# Altium PCB PiezoControlBoard.PcbDoc (part 1 of 3)
Units mm, origin at the board's own origin, x right, y up, seen from the top; angles counter-clockwise.
Board outline 90 x 115 mm, 4 copper layers (SIGNAL TOP, GND, PWR, SIGNAL BOT), stack 1.59 mm thick; 145 components, 86 nets, 512 pads, 287 vias.
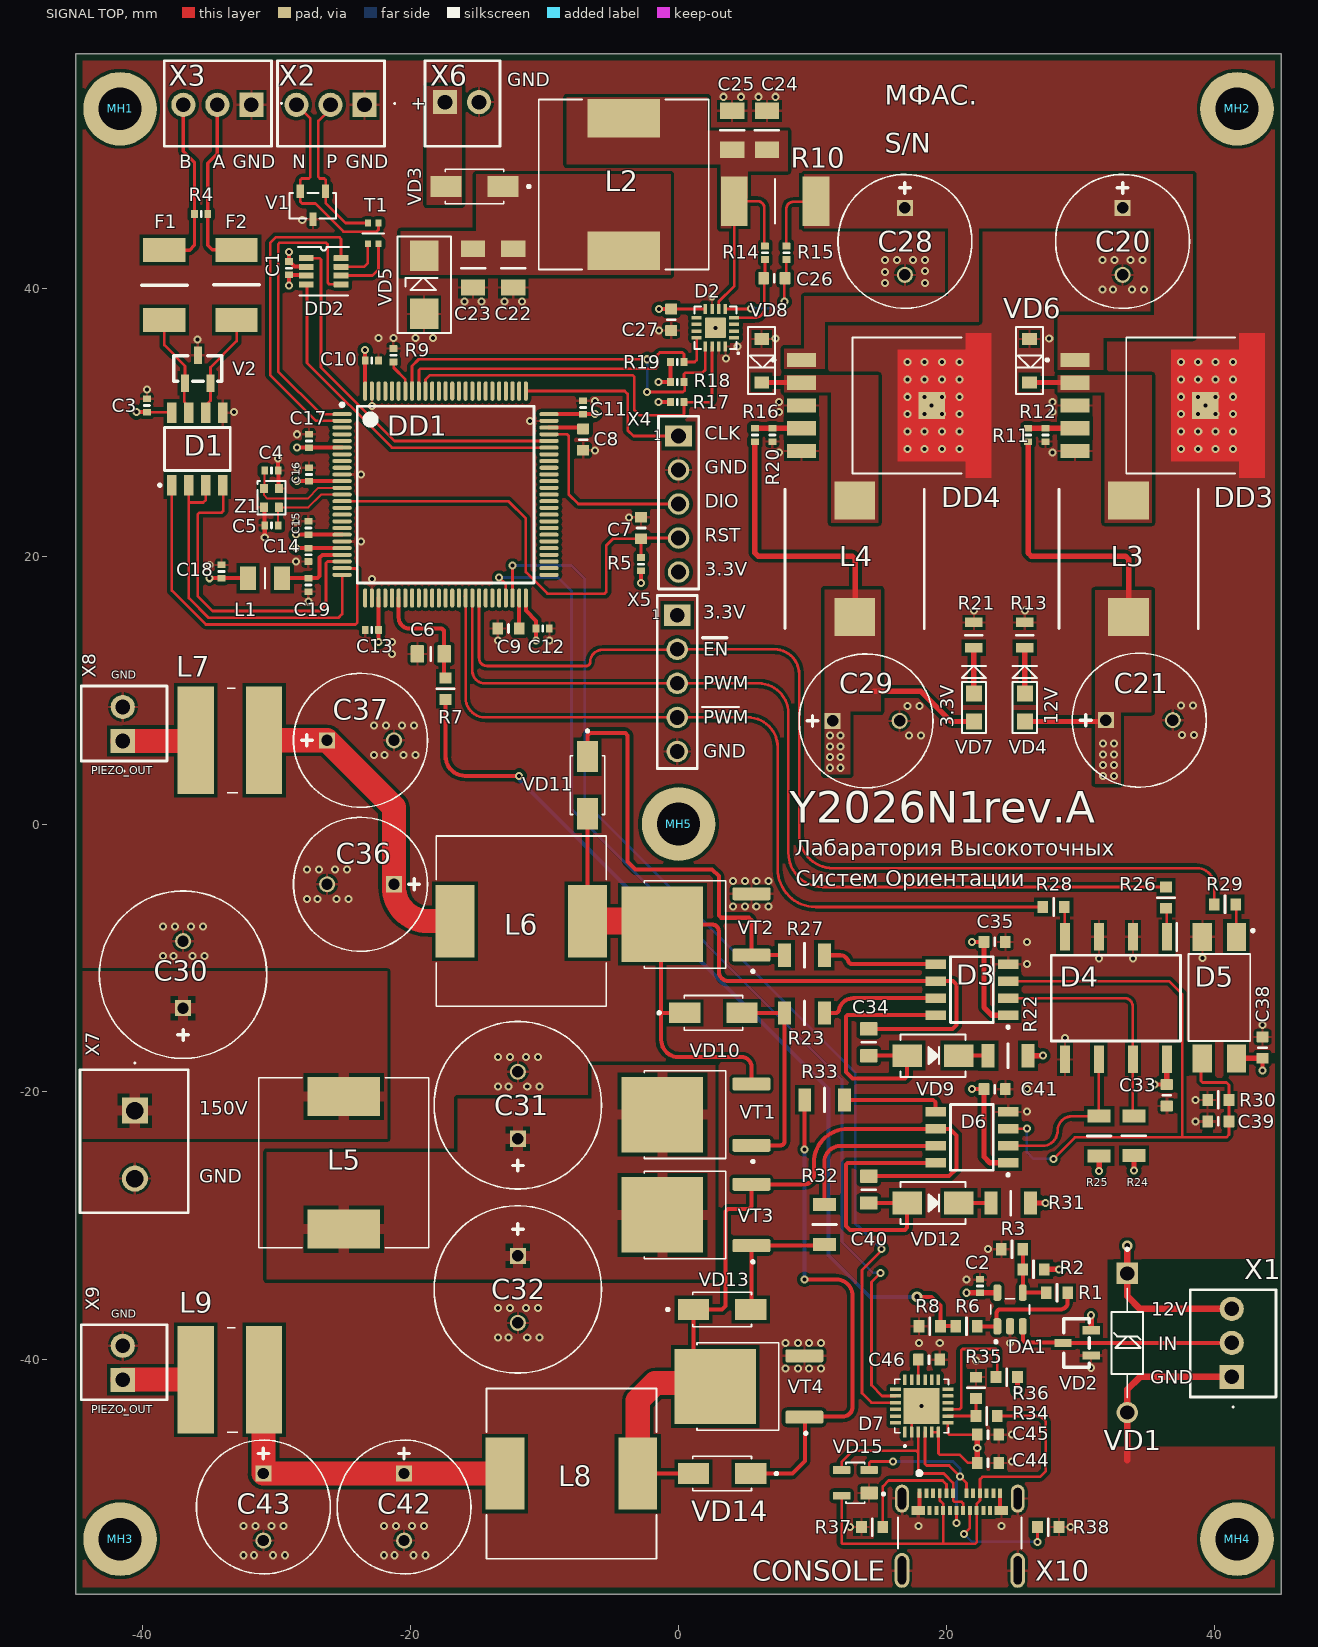
[diagram p0: SIGNAL TOP view]
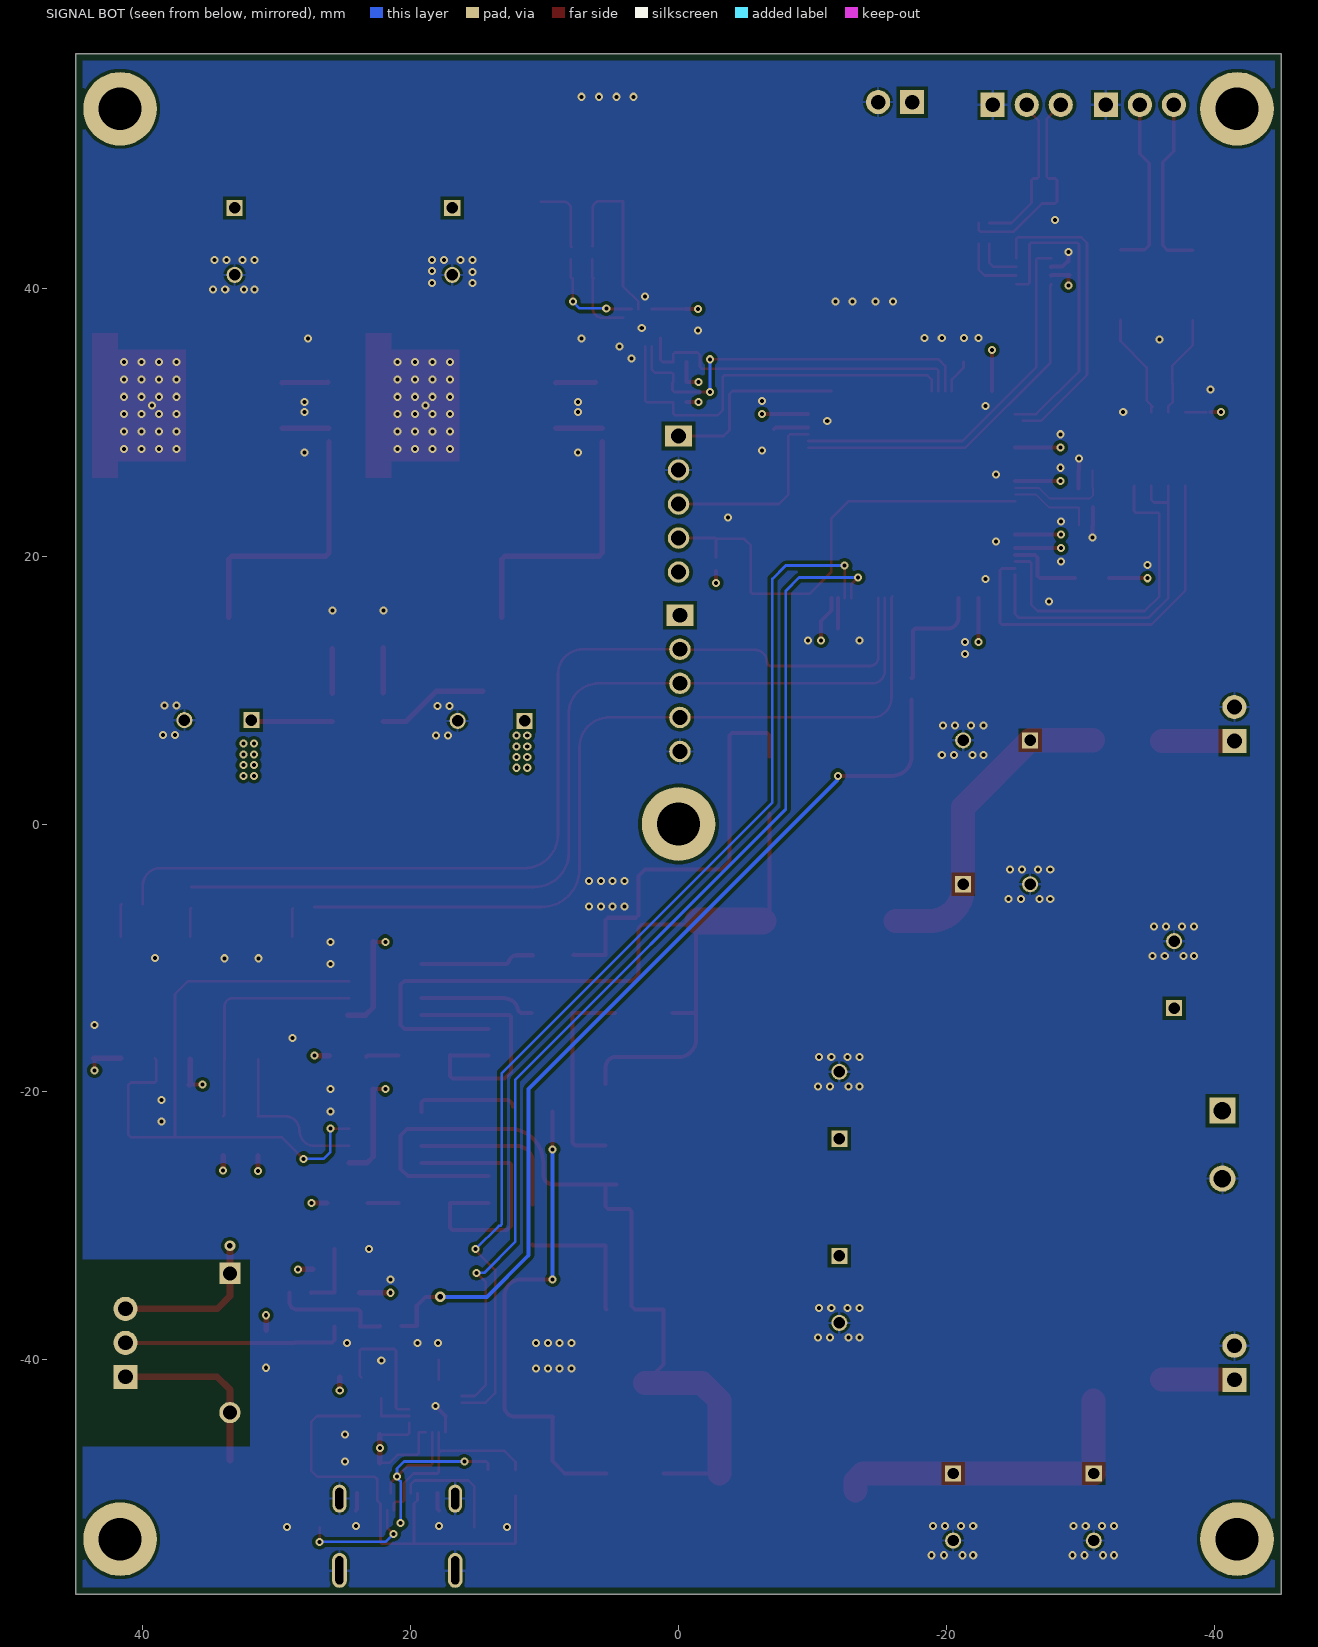
[diagram p1: SIGNAL BOT view, seen from below]
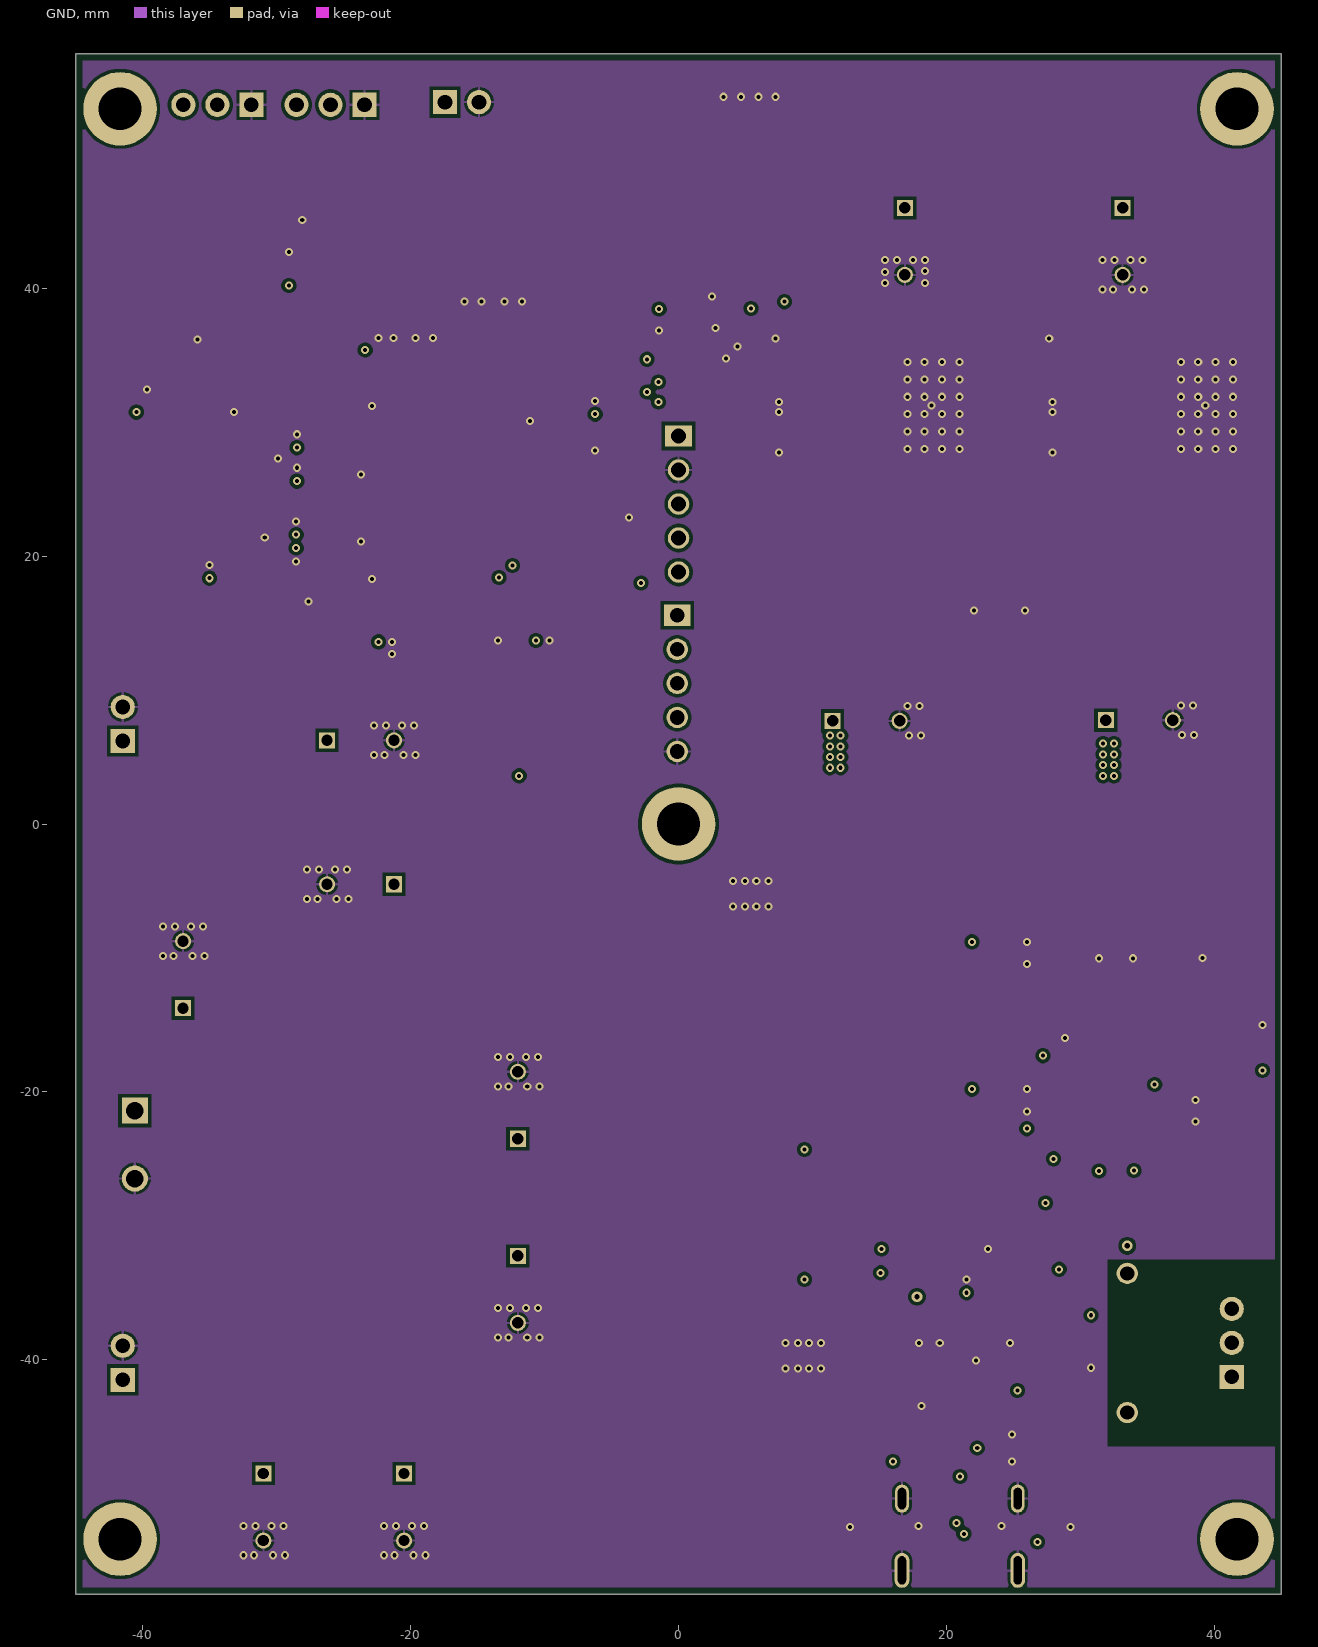
[diagram p2: GND]
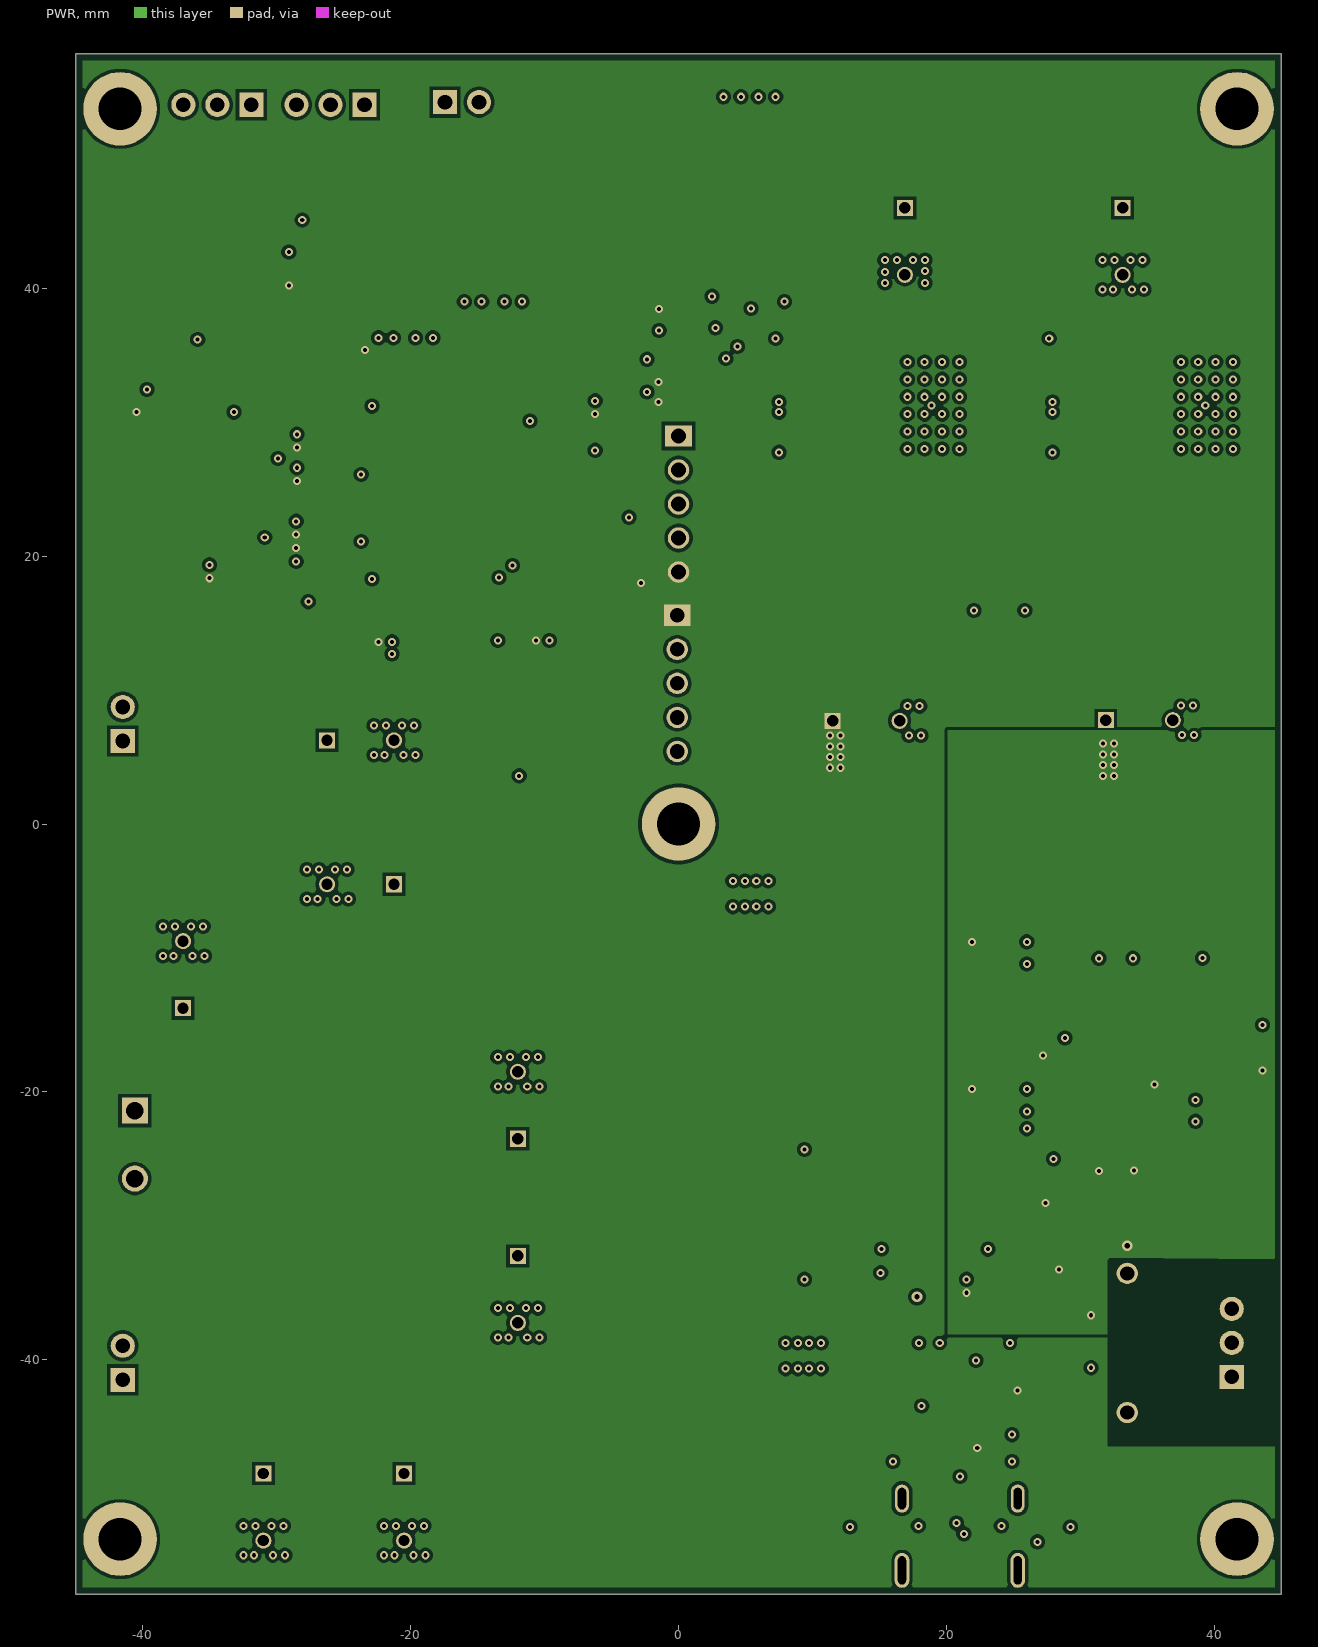
[diagram p3: PWR]
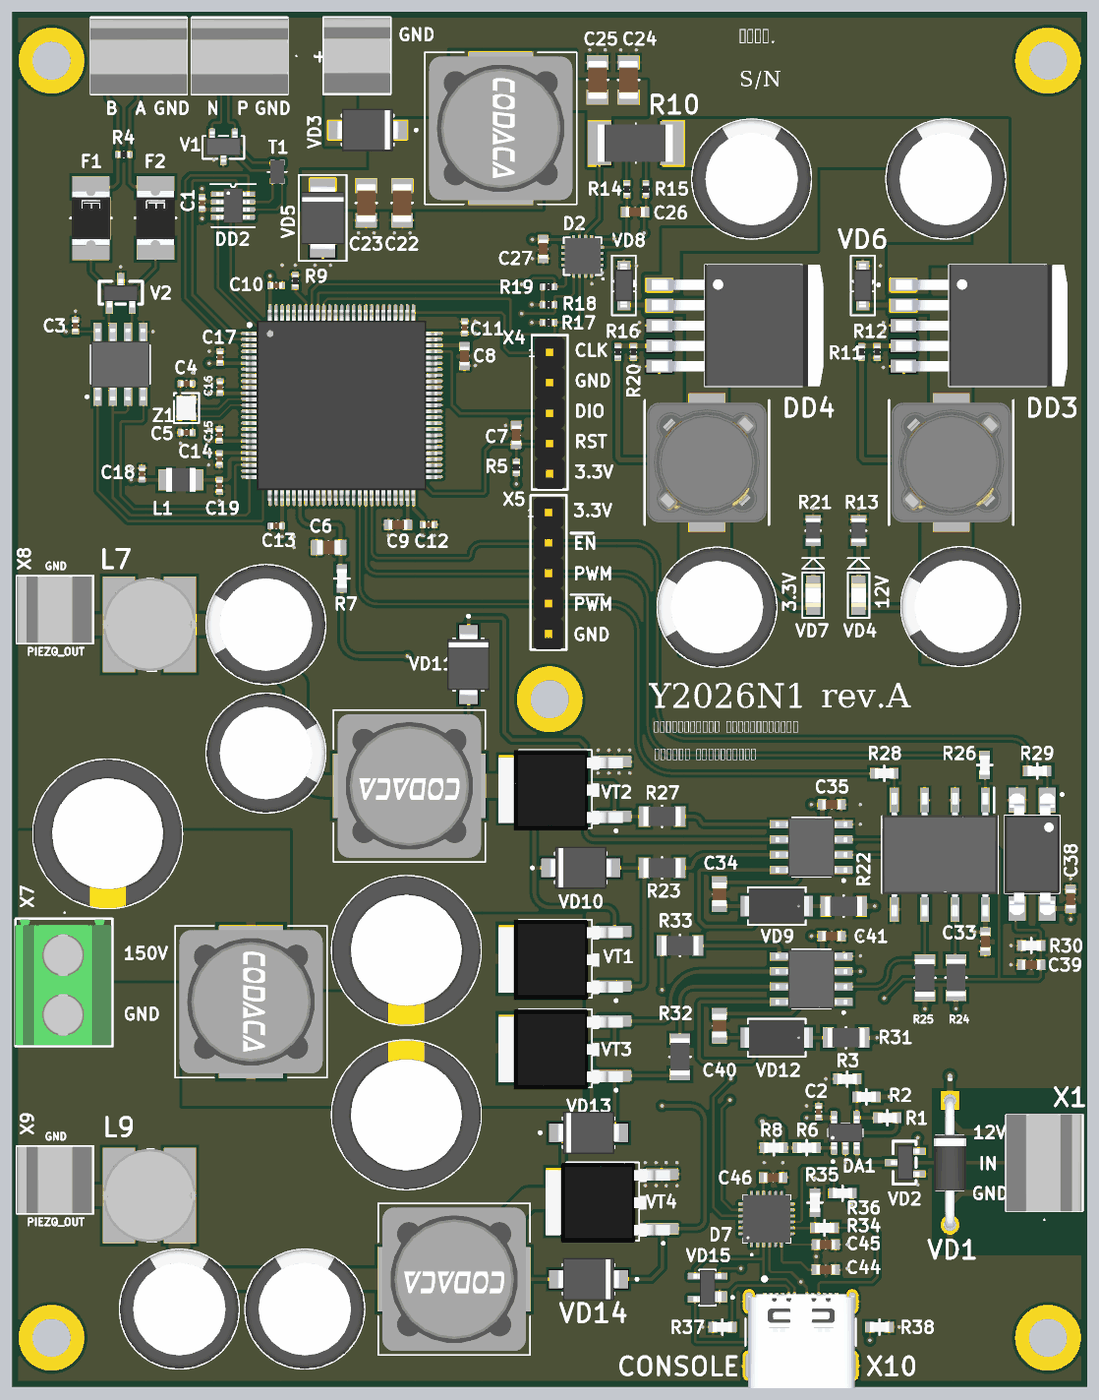
[diagram p5: 3D render of the assembled board from above, using the file's embedded part models]

## Layer stack, top to bottom
Top Solder: solder mask 0.01, Solder Resist, Dk 3.5
SIGNAL TOP: signal copper 0.035
Dielectric 2: prepreg 0.125, PP-006, Dk 4.1
GND: signal copper 0.035
Dielectric 1: dielectric 1.2, FR-4, Dk 4.8
PWR: signal copper 0.035
Dielectric 3: prepreg 0.125, PP-006, Dk 4.1
SIGNAL BOT: signal copper 0.035
Bot Solder: solder mask 0.01, Solder Resist, Dk 3.5

## Board outline
-45,-57.5 -45,57.5 45,57.5 45,-57.5

## Design rules (kind name [scope] priority, off if disabled: settings)
BoardOutlineClearance [All] p1: gap=0.2 ignorepadtopadclearanceinfootprint=FALSE
Clearance Clearance@Poly [All vs InPoly] p1: gap=0.25 ignorepadtopadclearanceinfootprint=FALSE
Clearance [All] p2: gap=0.2 ignorepadtopadclearanceinfootprint=FALSE
DiffPairsRouting [All] p1: maxlimit=0.4 minlimit=0.2 mostfreqgap=0.4 toplayer_mingap=0.4 toplayer_minwidth=0.2 toplayer_maxwidth=0.2 toplayer_prefwidth=0.2 bottomlayer_mingap=0.4 bottomlayer_minwidth=0.2 bottomlayer_maxwidth=0.2 bottomlayer_prefwidth=0.2 impedanceprofiledriven=TRUE impedanceprofileid={055DAC7E-D55A-460F-9663-2A1CB5194721} impedanceprofilevalue=100.000000 maxuncoupledlength=12.7
HoleSize [All] p1: absolutevalues=TRUE maxlimit=6 minlimit=0.2 maxpercent=80.000 minpercent=20.000
HoleToHoleClearance [All] p1: gap=0.2 allowstackedmicrovias=TRUE
MinimumSolderMaskSliver [All] p1: minsoldermaskwidth=0.1
PasteMaskExpansion [All] p1: expansion=-0.025
PlaneClearance [All] p1: clearance=0.25
PlaneConnect [All] p1: pad.planeconnectstyle=Relief pad.reliefexpansion=0.2 pad.reliefentries=4 pad.reliefconductorwidth=0.2 pad.reliefairgap=0.2 via.planeconnectstyle=Direct via.reliefexpansion=0.508 via.reliefentries=4 via.reliefconductorwidth=0.254 via.reliefairgap=0.254
PolygonConnect PolygonConnect@HV [InNetClass('HIGH_VOLTAGE')] p1: connectstyle=Relief reliefconductorwidth=0.8 reliefentries=4 polygonreliefangle="90 Angle" airgapwidth=0.3
PolygonConnect PWR_NET [InNetClass('POWER_NET')] p2: connectstyle=Direct reliefconductorwidth=0.254 reliefentries=4 polygonreliefangle="90 Angle" airgapwidth=0.254
PolygonConnect [All] p3: thpad.connectstyle=Relief thpad.reliefconductorwidth=0.2 thpad.reliefentries=4 thpad.polygonreliefangle="90 Angle" thpad.airgapwidth=0.2 smdpad.connectstyle=Relief smdpad.reliefconductorwidth=0.2 smdpad.reliefentries=4 smdpad.polygonreliefangle="90 Angle" smdpad.airgapwidth=0.2 via.connectstyle=Direct via.reliefconductorwidth=0.2 via.reliefentries=4 via.polygonreliefangle="90 Angle" via.airgapwidth=0.2
RoutingVias [All] p1: holewidth=0.3 width=0.6 viastyle="Through Hole" minholewidth=0.3 minwidth=0.6 maxholewidth=0.6 maxwidth=3
SilkToSilkClearance [All] p1: silktosilkclearance=0
SilkToSolderMaskClearance [IsPad] p1: minsilkscreentomaskgap=0.1 clearancetoexposedcopper=TRUE
SolderMaskExpansion Via [IsVia] p1: expansion=0.102 istentingtop=TRUE
SolderMaskExpansion [All] p2: expansion=0.025 istentingtop=FALSE
Width [All] p1: maxlimit=2 minlimit=0.125 preferedwidth=0.15
21 further rules are at their usual default settings.

## Classes and differential pairs
net class HIGH_VOLTAGE: +150V +150V_FILT
net class POWER_NET: +3.3V +12V NetC20_P NetC22_2 NetDD3_2 NetDD4_2 NetVD3_A PWR_IN pwr_in_filt
component class Power_Management: C20 C21 C22 C23 C24 C25 C26 C27 C28 C29 D2 DD3 DD4 L2 L3 L4 MH1 MH2 MH3 MH4 MH5 R10 R11 R12 R13 R14 R15 R16 R17 R18 R19 R20 R21 VD3 VD4 VD5 VD6 VD7 VD8 X6
component class MCU_Control: C1 C2 C3 C4 C5 C6 C7 C8 C9 C10 C11 C12 C13 C14 C15 C16 C17 C18 C19 D1 DA1 DD1 DD2 F1 F2 L1 R1 R2 R3 R4 R5 R6 R7 R8 R9 T1 V1 V2 VD1 VD2 X1 X2 X3 X4 X5 Z1
component class HV_Piezo_Driver: C30 C31 C32 C33 C34 C35 C36 C37 C38 C39 C40 C41 C42 C43 D3 D4 D5 D6 L5 L6 L7 L8 L9 R22 R23 R24 R25 R26 R27 R28 R29 R30 R31 R32 R33 VD9 VD10 VD11 VD12 VD13 VD14 VT1 VT2 VT3 VT4 X7 X8 X9
component class Console: C44 C45 C46 D7 R34 R35 R36 R37 R38 VD15 X10
differential pair CAN_1: +CAN_1_P -CAN_1_N
differential pair CAN_1F: +CAN_1F_P -CAN_1F_N

## Components (designator, comment, footprint, x,y, rotation, side; value= is the part's Value field where it differs from the comment)
C1 "CAP-0.1мкФ-10%-25В-X7R-0402" CAP-0402 -29.1,41.5 r90 top locked value=0.1мкФ
C2 "CAP-0.1мкФ-10%-25В-X7R-0402" CAP-0402 22.5,-34.5 r90 top locked value=0.1мкФ
C3 "CAP-0.1мкФ-10%-25В-X7R-0402" CAP-0402 -39.7,31.25 r90 top locked value=0.1мкФ
C4 "CAP-10 пФ-5%-50 В-NP0-0402" CAP-0402 -30.4,26.4 r180 top locked value="10 пФ"
C5 "CAP-10 пФ-5%-50 В-NP0-0402" CAP-0402 -30.4,22.3 r0 top locked value="10 пФ"
C6 "CAP-4.7нФ-5%-50В-C0G-0805" CAP-0805 -18.5,12.7 r0 top locked value=4.7нФ
C7 "CAP-2.2 мкФ-10%-25 В-X5R-0603" CAP-0603 -2.8,22.1 r270 top locked value="2.2 мкФ"
C8 "CAP-2.2 мкФ-10%-25 В-X5R-0603" CAP-0603 -7.125,28.7 r90 top locked value="2.2 мкФ"
C9 "CAP-2.2 мкФ-10%-25 В-X5R-0603" CAP-0603 -12.7,14.6 r0 top locked value="2.2 мкФ"
C10 "CAP-0.47 мкФ-10%-25 В-X5R-0402" CAP-0402 -22.9,34.6 r0 top locked value="0.47 мкФ"
C11 "CAP-0.47 мкФ-10%-25 В-X5R-0402" CAP-0402 -7.125,31.1 r90 top locked value="0.47 мкФ"
C12 "CAP-0.47 мкФ-10%-25 В-X5R-0402" CAP-0402 -10.15,14.6 r0 top locked value="0.47 мкФ"
C13 "CAP-0.47 мкФ-10%-25 В-X5R-0402" CAP-0402 -22.9,14.5 r180 top locked value="0.47 мкФ"
C14 "CAP-0.47 мкФ-10%-25 В-X5R-0402" CAP-0402 -27.65,20.1 r270 top locked value="0.47 мкФ"
C15 "CAP-0.47 мкФ-10%-25 В-X5R-0402" CAP-0402 -27.65,22.1 r90 top locked value="0.47 мкФ"
C16 "CAP-0.47 мкФ-10%-25 В-X5R-0402" CAP-0402 -27.6,26.1 r90 top locked value="0.47 мкФ"
C17 "CAP-0.47 мкФ-10%-25 В-X5R-0402" CAP-0402 -27.6,28.6 r90 top locked value="0.47 мкФ"
C18 "CAP-0.47 мкФ-10%-25 В-X5R-0402" CAP-0402 -34.125,18.85 r90 top locked value="0.47 мкФ"
C19 "CAP-0.1мкФ-10%-25В-X7R-0402" CAP-0402 -27.65,17.85 r90 top locked value=0.1мкФ
C20 "CAP-100мкФ-20%-100В-105°C-Radial" CAP_RADIAL_10X20_P5 33.15,43.5 r270 top locked value=100мкФ
C21 "CAP-1000мкФ-20%-25В-105°C-Radial" CAP_RADIAL_10X20_P5 34.4,7.75 r0 top locked value=1000мкФ
C22 "CAP-10 мкФ-10%-50 В-X5R-1206" CAP_1206 -12.35,41.5 r90 top locked value="10 мкФ"
C23 "CAP-10 мкФ-10%-50 В-X5R-1206" CAP_1206 -15.35,41.5 r90 top locked value="10 мкФ"
C24 "CAP-10 мкФ-10%-50 В-X5R-1206" CAP_1206 6.6,51.8 r270 top locked value="10 мкФ"
C25 "CAP-10 мкФ-10%-50 В-X5R-1206" CAP_1206 4,51.8 r270 top locked value="10 мкФ"
C26 "CAP-0.1мкФ-10%-50В-X7R-0603" CAP-0603 7.15,40.75 r0 top locked value=0.1мкФ
C27 "CAP-0.1мкФ-10%-50В-X7R-0603" CAP-0603 -0.55,37.65 r270 top locked value=0.1мкФ
C28 "CAP-100мкФ-20%-100В-105°C-Radial" CAP_RADIAL_10X20_P5 16.9,43.5 r270 top locked value=100мкФ
C29 "CAP-1000мкФ-20%-25В-105°C-Radial" CAP_RADIAL_10X20_P5 14,7.7 r0 top locked value=1000мкФ
C30 "CAP-100мкФ-20%-200В-105°C-Radial" CAP_RADIAL_13X17_P5 -37,-11.25 r90 top locked value=100мкФ
C31 "CAP-100мкФ-20%-200В-105°C-Radial" CAP_RADIAL_13X17_P5 -12,-21 r90 top locked value=100мкФ
C32 "CAP-100мкФ-20%-200В-105°C-Radial" CAP_RADIAL_13X17_P5 -12,-34.75 r270 top locked value=100мкФ
C33 "CAP-0.1мкФ-10%-50В-X7R-0603" CAP-0603 36.45,-20.25 r90 top locked value=0.1мкФ
C34 "CAP-0.33мкФ-10%-25В-X7R-0805" CAP-0805 14.2,-16.3 r270 top locked value=0.33мкФ
C35 "CAP-0.1мкФ-10%-50В-X7R-0603" CAP-0603 23.6,-8.8 r180 top locked value=0.1мкФ
C36 "CAP-10мкФ-20%-250В-105°C-Radial" CAP_RADIAL_10X20_P5 -23.75,-4.5 r180 top locked value=10мкФ
C37 "CAP-10мкФ-20%-250В-105°C-Radial" CAP_RADIAL_10X20_P5 -23.75,6.25 r0 top locked value=10мкФ
C38 "CAP-0.1мкФ-10%-50В-X7R-0603" CAP-0603 43.6,-16.7 r270 top locked value=0.1мкФ
C39 "CAP-0.1мкФ-10%-50В-X7R-0603" CAP-0603 40.3,-22.2 r0 top locked value=0.1мкФ
C40 "CAP-0.33мкФ-10%-25В-X7R-0805" CAP-0805 14.2,-27.3 r270 top locked value=0.33мкФ
C41 "CAP-0.1мкФ-10%-50В-X7R-0603" CAP-0603 23.6,-19.8 r180 top locked value=0.1мкФ
C42 "CAP-10мкФ-20%-250В-105°C-Radial" CAP_RADIAL_10X20_P5 -20.5,-51 r270 top locked value=10мкФ
C43 "CAP-10мкФ-20%-250В-105°C-Radial" CAP_RADIAL_10X20_P5 -31,-51 r270 top locked value=10мкФ
C44 "CAP-0.1 мкФ-10%-16 В-X7R-0603" CAP-0603 23.1,-47.7 r180 top value="0.1 мкФ"
C45 "CAP-0.1 мкФ-10%-16 В-X7R-0603" CAP-0603 23.1,-45.6 r180 top value="0.1 мкФ"
C46 "CAP-4.7 мкФ-10%-35 В-X5R-0603" CAP-0603 18.7,-40 r180 top value="4.7 мкФ"
D1 "MAX3485ESA" SOIC-8 -35.935,28 r90 top locked
D2 "INA230AIRGTR" VQFN-16 2.75,37.05 r90 top locked
D3 "IR2109STRPBF" SOIC-8 21.9,-12.365 r180 top locked
D4 "HCPL2731SD" SMD-8 32.65,-13 r270 top locked
D5 "FOD817BSD" SMD-4 40.38,-12.96 r270 top locked
D6 "IR2109STRPBF" SOIC-8 21.9,-23.4 r180 top locked
D7 "CP2104" QFN-24 18.15,-43.455 r90 top
DA1 "TLV271IDBVR" SOT-23-5 24.75,-36.25 r90 top locked
DD1 "STM32F407VGT6" LQFP-100 -17.4,24.6 r0 top locked
DD2 "TCAN330DCNT" SOT-23-8 -26.5,41.275 r0 top locked
DD3 "LM2575HVR-12" TO-263-5 36.15,31.25 r0 top locked
DD4 "LM2575HVS-3.3" TO-263-5 15.725,31.25 r0 top locked
F1 "1812L020/60DR" SMD-1812 -38.4,40.235 r270 top locked
F2 "1812L020/60DR" SMD-1812 -33,40.25 r270 top locked
L1 "4.7 мкГн" IND_1008 -30.875,18.35 r0 top locked
L2 "SPRH127-101M" IND_SPRH127-101M -4.1,47.75 r90 top locked
L3 "100мкГн" IND_10.4X10.4 33.6,19.8 r270 top locked
L4 "100мкГн" IND_10.4X10.4 13.15,19.8 r270 top locked
L5 "SPRH127-221M" IND_12.3X12.3 -25,-25.3 r270 top locked
L6 "SPRH127-221M" IND_12.3X12.3 -11.75,-7.25 r180 top locked
L7 "SDR0805-331KL" IND_7.8X7.8 -33.5,6.25 r270 top locked
L8 "SPRH127-221M" IND_12.3X12.3 -8,-48.5 r180 top locked
L9 "SDR0805-331KL" IND_7.8X7.8 -33.5,-41.5 r270 top locked
MH1 "M3" M3#1 -41.7,53.4 r0 top locked
MH2 "M3" M3#2 40.75,53.5 r0 top locked
MH3 "M3" M3#3 40.75,48.25 r0 top locked
MH4 "M3" M3#4 40.5,-57 r0 top locked
MH5 "M3" M3#1 0,0 r0 top locked
R1 "RES-47 кОм-1%-0.1Вт-0603" RES-0603 28.25,-35 r0 top locked value="47 кОм"
R2 "RES-20 кОм-1%-0.1Вт-0603" RES-0603 26.5,-33.25 r0 top locked value="20 кОм"
R3 "RES-20 кОм-1%-0.1Вт-0603" RES-0603 24.9,-31.75 r0 top locked value="20 кОм"
R4 "RES-120 Ом-1%-0.062Вт-0402" RES-0402 -35.65,45.55 r180 top locked value="120 Ом"
R5 "RES-4.7 кОм-5%-0.062 Вт-0402" RES-0402 -2.8,19.4 r270 top locked value="4.7 кОм"
R6 "RES-27 кОм-1%-0.1Вт-0603" RES-0603 21.5,-37.5 r0 top locked value="27 кОм"
R7 "RES-220 Ом-1%-0.1Вт-0603" RES-0603 -17.4,10.1 r90 top locked value="220 Ом"
R8 "RES-10 кОм-0.1%-0.1Вт-0603" RES-0603 18.75,-37.5 r0 top locked value="10 кОм"
R9 "RES-0 Ом-5%-0.062 Вт-0402" RES-0402 -21.3,35 r270 top locked value="0 Ом"
R10 "RES-0.02 Ом-1%-3 Вт-2512" RES-2512 4.15,46.5 r0 top locked value="0.02 Ом"
R11 "RES-0 Ом-5%-0.062 Вт-0402" RES-0402 26.1,29.05 r270 top locked value="0 Ом"
R12 "RES-Не паять-----0402" RES-0402 27.4,29.05 r90 top locked value="Не паять"
R13 "RES-3.01 кОм-1%-0.125Вт-0805" RES-0805 25.85,14.1 r270 top locked value="3.01 кОм"
R14 "RES-4.7 Ом-5%-0.062 Вт-0402" RES-0402 6.45,42.65 r90 top locked value="4.7 Ом"
R15 "RES-4.7 Ом-5%-0.062 Вт-0402" RES-0402 8.05,42.65 r90 top locked value="4.7 Ом"
R16 "RES-0 Ом-5%-0.062 Вт-0402" RES-0402 5.7,29.05 r270 top locked value="0 Ом"
R17 "RES-4.7кОм-5%-0.062Вт-0402" RES-0402 -0.1,31.5 r180 top locked value=4.7кОм
R18 "RES-4.7кОм-5%-0.062Вт-0402" RES-0402 -0.1,33 r180 top locked value=4.7кОм
R19 "RES-4.7кОм-5%-0.062Вт-0402" RES-0402 -0.1,34.5 r180 top locked value=4.7кОм
R20 "RES-Не паять-----0402" RES-0402 7,29.05 r90 top locked value="Не паять"
R21 "RES-1 кОм-1%-0.125Вт-0805" RES-0805 22.05,14.1 r270 top locked value="1 кОм"
R22 "RES-1 Ом-5%-0.25Вт-1206" RES-1206 24.6,-17.3 r180 top locked value="1 Ом"
R23 "RES-33 Ом-5%-0,25Вт-1206" RES-1206 9.4,-14.1 r180 top locked value="33 Ом"
R24 "RES-820 Ом-5%-0.25Вт-1206" RES-1206 34,-23.28 r270 top locked value="820 Ом"
R25 "RES-820 Ом-5%-0.25Вт-1206" RES-1206 31.4,-23.3 r270 top locked value="820 Ом"
R26 "RES-390 Ом-5%-250мВт-0603" RES-0603 36.4,-5.5 r270 top locked value="390 Ом"
R27 "RES-33 Ом-5%-0,25Вт-1206" RES-1206 9.4,-9.8 r180 top locked value="33 Ом"
R28 "RES-390 Ом-5%-250мВт-0603" RES-0603 28,-6.2 r0 top locked value="390 Ом"
R29 "RES-390 Ом-5%-250мВт-0603" RES-0603 40.8,-6 r0 top locked value="390 Ом"
R30 "RES-10 кОм-5%-0.1Вт-0603" RES-0603 40.3,-20.6 r0 top locked value="10 кОм"
R31 "RES-1 Ом-5%-0.25Вт-1206" RES-1206 24.8,-28.3 r180 top locked value="1 Ом"
R32 "RES-33 Ом-5%-0,25Вт-1206" RES-1206 10.9,-29.9 r270 top locked value="33 Ом"
R33 "RES-33 Ом-5%-0,25Вт-1206" RES-1206 10.9,-20.6 r180 top locked value="33 Ом"
R34 "RES-24 кОм-1%-0.1 Вт-0603" RES-0603 23,-44.2 r180 top value="24 кОм"
R35 "RES-47 кОм-1%-0.1 Вт-0603" RES-0603 22.2,-42.1 r90 top value="47 кОм"
R36 "RES-4.7 кОм-1%-0.1 Вт-0603" RES-0603 24.5,-41.3 r180 top value="4.7 кОм"
R37 "RES-5.1 кОм-1%-0.1 Вт-0603" RES-0603 14.45,-52.5 r0 top value="5.1 кОм"
R38 "RES-5.1 кОм-1%-0.1 Вт-0603" RES-0603 27.6,-52.5 r180 top value="5.1 кОм"
T1 "DLW21SN921SK2L" DLW21S -22.8,44.1 r270 top locked
V1 "ESDCAN24-2BLY" SOT23-3L -27.3,46.2 r0 top locked
V2 "SM712.TCT" SOT-23 -35.9,33.95 r90 top locked
VD1 "Д814Д" КД-8 33.5,-38.75 r270 top locked
VD2 "BAV199" SOT-23-3 29.75,-38.75 r180 top locked
VD3 "B340A-E3/61T" DO-214AC -15.235,47.6 r180 top locked
VD4 "KP-2012SYC" "LED 0805" 25.85,8.7 r90 top locked
VD5 "SMBJ36A" DO-214AA -19,40.25 r90 top locked
VD6 "1N5819W" SOD-123 26.2,34.6 r270 top locked
VD7 "KP-2012HD" "LED 0805" 22.05,8.7 r90 top locked
VD8 "1N5819W" SOD-123 6.2,34.6 r270 top locked
VD9 "STTH2R06A" SMA 19,-17.3 r180 top locked
VD10 "SMAJ12CA" DO-214AC 2.6,-14.1 r0 top locked
VD11 "SMAJ12CA" DO-214AC -6.8,2.9 r270 top locked
VD12 "STTH2R06A" SMA 19,-28.3 r180 top locked
VD13 "SMAJ12CA" DO-214AC 3.25,-36.25 r0 top locked
VD14 "SMAJ12CA" DO-214AC 3.25,-48.5 r180 top locked
VD15 "SP0503BAHTG" SOT-143 13.2,-49.2 r90 top value=30pF
VT1 "FQD12N20LTM" DPAK3 1.3,-21.7 r180 top locked
VT2 "FQD12N20LTM" DPAK3 1.3,-7.5 r180 top locked
VT3 "FQD12N20LTM" DPAK3 1.3,-29.19 r180 top locked
VT4 "FQD12N20LTM" DPAK3 5.25,-42 r180 top locked
X1 "DG308-2.54-03P" DG30825403P1400AH 41.3,-41.28 r90 top locked
X2 "DG308-2.54-03P" DG30825403P1400AH -23.453,53.7 r180 top locked
X3 "DG308-2.54-03P" DG30825403P1400AH -31.9,53.7 r180 top locked
X4 "DS1021-1x5" DS1021-1X5 0,27.7 r0 top locked
X5 "DS1021-1x5" DS1021-1X5 -0.1,14.31 r0 top locked
X6 "DG308-2.54-02P" DG30825402P1400AH -17.44,53.9 r0 top locked
X7 "DG127-5.08-02P" DG12750802P141000AH -40.6,-21.4 r270 top locked
X8 "DG308-2.54-02P" DG30825402P1400AH -41.5,6.2 r90 top locked
X9 "DG308-2.54-02P" DG30825402P1400AH -41.5,-41.5 r90 top locked
X10 "105450-0101" USB-C 21,-57.5 r0 top locked
Z1 "ABM11-25.000MHZ-D2X-T" ABM11 -30.4,24.35 r270 top locked

## Footprints (in the part's own frame and the unit in brackets; to place one, negate y for a bottom-side part, rotate by r counter-clockwise, add the part's x,y. Pads: shape width x height; smd on the part's side, far side on the other; paste and mask are expansions set on the pad)
ABM11 [mm]
  rrect10% 0.7x0.6 smd: 1(-0.7,-0.55) 2(0.7,-0.55) 3(0.7,0.55) 4(-0.7,0.55)
  silkscreen extent -1.25,-1.05 1.25,1.05, body extent -1,-0.83 1,0.78, height 0.6
CAP-0402 [mm]
  rrect10% 0.5x0.6 smd: 1(-0.5,0) 2(0.5,0)
  silkscreen extent 0,-0.2 0,0.2, body extent -0.5,-0.25 0.5,0.25, height 0.5
CAP-0603 [mm]
  rrect10% 0.8x0.9 smd: 1(-0.8,0) 2(0.8,0)
  silkscreen extent 0,-0.3 0,0.3, body extent -0.8,-0.4 0.8,0.4, height 0.8
CAP-0805 [mm]
  rrect10% 1x1.3 smd: 1(-1,0) 2(1,0)
  silkscreen extent 0,-0.51 0,0.51, body extent -1,-0.6 1,0.6, height 1.2
CAP_1206 [mm]
  rect 1.21x1.82 smd: 1(-1.45,0) 2(1.45,0)
  silkscreen extent 0,-0.89 0,0.89, body extent -1.6,-0.8 1.6,0.8, height 1.81
CAP_RADIAL_10X20_P5 [mm]
  round 1.2 hole 0.85: N(2.5,0)
  rect 1.2x1.2 hole 0.85: P(-2.5,0)
  silkscreen extent -5,-5 5,5, body extent -5,-5 5,5, height 20.01
CAP_RADIAL_13X17_P5 [mm]
  round 1.2 hole 0.85: N(2.5,0)
  rect 1.2x1.2 hole 0.85: P(-2.5,0)
  silkscreen extent -6.25,-6.25 6.25,6.25, body extent -6.23,-6.25 6.25,6.25, height 25.01
DG12750802P141000AH [mm]
  rect 1.95x1.95 hole 1.3: 1(0,0)
  round 1.95 hole 1.3: 2(5.08,0)
  silkscreen extent -3.61,-4.1 7.62,4, body extent -3.01,-4.18 7.49,3.92, height 10.01
DG30825402P1400AH [mm]
  rect 1.8x1.8 hole 1.1: 1(0,0)
  round 1.8 hole 1.1: 2(2.54,0)
  silkscreen extent -2.3,-3.3 4.1,3.1, body extent -1.48,-3.2 4.08,3.1, height 8.61
DG30825403P1400AH [mm]
  rect 1.8x1.8 hole 1.1: 1(0,0)
  round 1.8 hole 1.1: 2(2.54,0) 3(5.08,0)
  silkscreen extent -2.3,-3.3 6.5,3.1, body extent -1.55,-3.21 6.55,3.09, height 8.61
DLW21S [mm]
  rrect10% 0.5x0.45 smd: 1(-0.775,0.4) 2(0.775,0.4) 3(0.775,-0.4) 4(-0.775,-0.4)
  silkscreen extent 0,-0.8 0,0.8, body extent -1,-0.6 1,0.6, height 1.2
DO-214AA [mm]
  rect 2.28x2.12 smd paste+0 mask+0.102: A(-2.165,0) C(2.165,0)
  silkscreen extent -3.6,-2 3.6,2, body extent -2.67,-1.81 2.67,1.81, height 2.66
DO-214AC [mm]
  rect 2.33x1.55 smd paste+0 mask+0.102: A(2.135,0) C(-2.135,0)
  silkscreen extent -4.15,-1.29 2.19,1.29, body extent -2.61,-1.78 2.61,1.78, height 2.44
DPAK3 [mm]
  rect 6.1x5.63 smd paste-4: D(2.51,0)
  rrect25% 2.83x0.97 smd: G(-4.14,2.29) S(-4.14,-2.29)
  silkscreen extent -4.35,-3.27 3.87,3.6, body extent -4.81,-3.25 5.58,3.45, height 2.39
DS1021-1X5 [mm]
  rect 2x1.6 hole 1.1: 1(0,1.27)
  round 1.6 hole 1.1: 2(0,-1.27) 3(0,-3.81) 4(0,-6.35) 5(0,-8.89)
  silkscreen extent -1.5,-10.16 1.5,2.75, body extent -1.27,-10.12 1.27,2.58, height 8.89
IND_7.8X7.8 [mm]
  rect 8x2.7 smd: 1(0,2.55) 2(0,-2.55)
  silkscreen extent -3.9,-0.2 3.9,0.6, body extent -3.9,-3.9 3.9,3.9, height 5.31
IND_10.4X10.4 [mm]
  rect 2.85x3.05 smd: 1(-4.35,0) 2(4.35,0)
  silkscreen extent -5.2,-5.2 5.2,5.2, body extent -5,-5 5,5, height 4.71
IND_12.3X12.3 [mm]
  rect 2.9x5.4 smd: 1(-4.95,0) 2(4.95,0)
  silkscreen extent -6.35,-6.35 6.35,6.35, body extent -6,-6 6,6, height 8.06
IND_1008 [mm]
  rect 1.2x1.75 smd: 1(-1.275,0) 2(1.275,0)
  silkscreen extent 0,-0.75 0,0.75, body extent -1.25,-1 1.25,1, height 1.01
IND_SPRH127-101M [mm]
  rect 2.9x5.4 smd: 1(-4.95,0) 2(4.95,0)
  silkscreen extent -6.35,-6.35 6.35,6.35, body extent -6,-6 6,6, height 8.06
"LED 0805" [mm]
  rect 1.2x1.2 smd: 1(-1.05,0) 2(1.05,0)
  silkscreen extent -1.9,-0.9 3.1,0.9, body extent -1,-0.63 1,0.63, height 1.1
LQFP-100 [mm]
  oval 1.45x0.3 smd: 1(-7.725,6) 2(-7.725,5.5) 3(-7.725,5) 4(-7.725,4.5) 5(-7.725,4) 6(-7.725,3.5) 7(-7.725,3) 8(-7.725,2.5) 9(-7.725,2) 10(-7.725,1.5) 11(-7.725,1) 12(-7.725,0.5) 13(-7.725,0) 14(-7.725,-0.5) 15(-7.725,-1) 16(-7.725,-1.5) 17(-7.725,-2) 18(-7.725,-2.5) 19(-7.725,-3) 20(-7.725,-3.5) 21(-7.725,-4) 22(-7.725,-4.5) 23(-7.725,-5) 24(-7.725,-5.5) 25(-7.725,-6) 51(7.725,-6) 52(7.725,-5.5) 53(7.725,-5) 54(7.725,-4.5) 55(7.725,-4) 56(7.725,-3.5) 57(7.725,-3) 58(7.725,-2.5) 59(7.725,-2) 60(7.725,-1.5) 61(7.725,-1) 62(7.725,-0.5) 63(7.725,0) 64(7.725,0.5) 65(7.725,1) 66(7.725,1.5) 67(7.725,2) 68(7.725,2.5) 69(7.725,3) 70(7.725,3.5) 71(7.725,4) 72(7.725,4.5) 73(7.725,5) 74(7.725,5.5) 75(7.725,6)
  oval 0.3x1.45 smd: 26(-6,-7.725) 27(-5.5,-7.725) 28(-5,-7.725) 29(-4.5,-7.725) 30(-4,-7.725) 31(-3.5,-7.725) 32(-3,-7.725) 33(-2.5,-7.725) 34(-2,-7.725) 35(-1.5,-7.725) 36(-1,-7.725) 37(-0.5,-7.725) 38(0,-7.725) 39(0.5,-7.725) 40(1,-7.725) 41(1.5,-7.725) 42(2,-7.725) 43(2.5,-7.725) 44(3,-7.725) 45(3.5,-7.725) 46(4,-7.725) 47(4.5,-7.725) 48(5,-7.725) 49(5.5,-7.725) 50(6,-7.725) 76(6,7.725) 77(5.5,7.725) 78(5,7.725) 79(4.5,7.725) 80(4,7.725) 81(3.5,7.725) 82(3,7.725) 83(2.5,7.725) 84(2,7.725) 85(1.5,7.725) 86(1,7.725) 87(0.5,7.725) 88(0,7.725) 89(-0.5,7.725) 90(-1,7.725) 91(-1.5,7.725) 92(-2,7.725) 93(-2.5,7.725) 94(-3,7.725) 95(-3.5,7.725) 96(-4,7.725) 97(-4.5,7.725) 98(-5,7.725) 99(-5.5,7.725) 100(-6,7.725)
  silkscreen extent -7.85,-6.6 6.6,6.82, body extent -8.02,-8.02 7.97,7.97, height 1.6
M3#1 [mm]
  round 5.5 hole 3.2: 1(0,0)
M3#2 [mm]
  round 5.5 hole 3.2: 1(0.95,-0.1)
M3#3 [mm]
  round 5.5 hole 3.2: 1(-82.45,-101.65)
M3#4 [mm]
  round 5.5 hole 3.2: 1(1.2,3.6)
QFN-24 [mm]
  rrect10% 0.81x0.26 smd: 1(-1.955,1.25) 2(-1.955,0.75) 3(-1.955,0.25) 4(-1.955,-0.25) 5(-1.955,-0.75) 6(-1.955,-1.25) 13(1.955,-1.25) 14(1.955,-0.75) 15(1.955,-0.25) 16(1.955,0.25) 17(1.955,0.75) 18(1.955,1.25)
  rrect10% 0.26x0.81 smd: 7(-1.25,-1.955) 8(-0.75,-1.955) 9(-0.25,-1.955) 10(0.25,-1.955) 11(0.75,-1.955) 12(1.25,-1.955) 19(1.25,1.955) 20(0.75,1.955) 21(0.25,1.955) 22(-0.25,1.955) 23(-0.75,1.955) 24(-1.25,1.955)
  rect 2.68x2.68 smd paste-2: 25(0,0)
  silkscreen extent -3.07,-2 2,2, body extent -2,-2 2,2, height 0.81
RES-0402 [mm]
  rrect10% 0.5x0.6 smd: 1(-0.5,0) 2(0.5,0)
  silkscreen extent 0,-0.2 0,0.2, body extent -0.5,-0.25 0.5,0.25, height 0.3
RES-0603 [mm]
  rect 0.8x0.9 smd: 1(-0.8,0) 2(0.8,0)
  silkscreen extent 0,-0.64 0,0.64, body extent -0.8,-0.43 0.8,0.43, height 0.52
RES-0805 [mm]
  rect 0.7x1.3 smd: 1(-0.95,0) 2(0.95,0)
  silkscreen extent 0,-0.64 0,0.64, body extent -1.02,-0.6 0.98,0.6, height 0.7
RES-1206 [mm]
  rect 0.97x1.73 smd: 1(-1.48,0) 2(1.48,0)
  silkscreen extent 0,-0.89 0,0.89, body extent -1.55,-0.8 1.55,0.8, height 0.66
RES-2512 [mm]
  rect 2x3.7 smd mask+0.1: 1(0,0) 2(6.1,0)
  silkscreen extent 3.05,-1.65 3.05,1.65, body extent -0.15,-1.55 6.15,1.55, height 0.76
SMA [mil]
  rect 87x67 smd paste+0 mask+0: 1(-76,0) 2(76,0)
  silkscreen extent -96,-62 96,62, body extent -106,-57 106,57, height 104
SMD-4 [mm]
  rect 2.09x1.44 smd: 1(-4.54,1.27) 2(-4.54,-1.27) 3(4.54,-1.27) 4(4.54,1.27)
  silkscreen extent -5.1,-2.3 3.25,2.6, body extent -5.08,-2.3 5.08,2.3, height 3.85
SMD-8 [mm]
  rect 2.05x0.75 smd: 1(-4.575,3.81) 2(-4.575,1.27) 3(-4.575,-1.27) 4(-4.575,-3.81) 5(4.575,-3.81) 6(4.575,-1.27) 7(4.575,1.27) 8(4.575,3.81)
  silkscreen extent -5.6,-4.83 3.2,4.83, body extent -5.15,-4.83 5.15,4.83, height 5.08
SMD-1812 [mm]
  rect 1.78x3.15 smd: 1(-2.615,0) 2(2.615,0)
  silkscreen extent 0,-1.7 0,1.7, body extent -2.27,-1.63 2.27,1.63, height 1.25
SOD-123 [mm]
  rect 0.9x1.1 smd: 1(-1.62,0) 2(1.62,0)
  silkscreen extent -2.5,-1 2.5,1, body extent -1.83,-0.77 1.83,0.77, height 1.5
SOIC-8 [mm]
  rect 1.525x0.7 smd: 1(-2.712,1.905) 2(-2.712,0.635) 3(-2.712,-0.635) 4(-2.712,-1.905) 5(2.712,-1.905) 6(2.712,-0.635) 7(2.712,0.635) 8(2.712,1.905)
  silkscreen extent -2.8,-2.45 1.6,2.9, body extent -3,-2.45 3,2.45, height 1.75
SOT23-3L [mm]
  rrect10% 0.53x1.01 smd: 1(-0.95,1.045) 2(0.95,1.045) 3(0,-1.045)
  silkscreen extent -1.75,-1 1.73,0.9, body extent -1.45,-1.28 1.45,1.28, height 1.25
SOT-23 [mm]
  rect 1.3x0.6 smd: 1(-1.05,0.95) 2(-1.05,-0.95) 3(1.05,0)
  silkscreen extent -0.9,-1.8 1,1.8, body extent -1.18,-1.45 1.18,1.45, height 1.21
SOT-23-3 [mm]
  rect 1.3x0.6 smd: 1(-1.05,0.95) 2(-1.05,-0.95) 3(1.05,0)
  silkscreen extent -0.9,-1.8 1,1.8, body extent -1.18,-1.45 1.18,1.45, height 1.21
SOT-23-5 [mm]
  rrect50% 1.21x0.59 smd: 1(-1.255,0.95) 2(-1.255,0) 3(-1.255,-0.95) 4(1.255,-0.95) 5(1.255,0.95)
  silkscreen extent -2.51,-1.45 0.8,1.45, body extent -1.4,-1.45 1.4,1.45, height 1.31
SOT-23-8 [mm]
  rrect10% 1.1x0.45 smd: 1(-1.3,0.975) 2(-1.3,0.325) 3(-1.3,-0.325) 4(-1.3,-0.975) 5(1.3,-0.975) 6(1.3,-0.325) 7(1.3,0.325) 8(1.3,0.975)
  silkscreen extent -1.9,-1.8 1.9,1.8, body extent -1.4,-1.45 1.4,1.45, height 1.45
SOT-143 [mm]
  rrect15% 0.99x1.3 smd: 1(-0.76,-1.025)
  rrect15% 0.59x1.3 smd: 2(0.96,-1.025) 3(0.96,1.025) 4(-0.96,1.025)
  silkscreen extent -1.52,-2.2 1.52,0.7, body extent -1.46,-1.18 1.46,1.18, height 1.23
TO-263-5 [mm]
  rect 2.16x1.07 smd paste+0 mask+0.102: 1(-6.545,3.4) 2(-6.545,1.7) 3(-6.545,0) 4(-6.545,-1.7) 5(-6.545,-3.4)
  rect 2x2 smd paste-2 mask+0: PAD(3.175,0)
  SIGNAL TOP region: 7.625,-5.4 5.715,-5.4 5.715,-4.165 0.635,-4.165 0.635,4.165 5.715,4.165 5.715,5.4 7.625,5.4
  silkscreen extent -8.72,-5.08 5.4,5.08, body extent -7.18,-5.08 7.18,5.08, height 4.77
USB-C [mm]
  rect 0.298x0.7 smd: A1(-3,7.54) A2(-2.5,7.54) A3(-2,7.54) A4(-1.5,7.54) A5(-1,7.54) A6(-0.5,7.54) A7(0.5,7.54) A8(1,7.54) A9(1.5,7.54) A10(2,7.54) A11(2.5,7.54) A12(3,7.54) B2(2.25,6.24) B3(1.75,6.24) B4(1.25,6.24) B5(0.75,6.24) B6(0.25,6.24) B7(-0.25,6.24) B8(-0.75,6.24) B9(-1.25,6.24) B10(-1.75,6.24) B11(-2.25,6.24)
  rect 0.998x0.7 smd: B1(3.1,6.24) B12(-3.1,6.24)
  oval 1.1x2.6 hole 0.6 slot 2.1 at 90 deg mask+0.064: SHD(-4.32,1.77) SHD(4.32,1.77)
  oval 1.036x2.1 hole 0.6 slot 1.6 at 90 deg mask+0.064: SHD(-4.32,7.13) SHD(4.32,7.13)
  silkscreen extent -4.62,3.42 4.62,9.17, body extent -4.42,-0.13 4.52,7.77, height 3.21
VQFN-16 [mm]
  rrect10% 0.75x0.26 smd: 1(-1.4,-0.75) 2(-1.4,-0.25) 3(-1.4,0.25) 4(-1.4,0.75) 9(1.4,0.75) 10(1.4,0.25) 11(1.4,-0.25) 12(1.4,-0.75)
  rrect10% 0.26x0.75 smd: 5(-0.75,1.4) 6(-0.25,1.4) 7(0.25,1.4) 8(0.75,1.4) 13(0.75,-1.4) 14(0.25,-1.4) 15(-0.25,-1.4) 16(-0.75,-1.4)
  rrect10% 1.55x1.55 smd: PAD(0,0)
  silkscreen extent -1.91,-1.71 1.58,1.58, body extent -1.5,-1.5 1.5,1.5, height 1
КД-8 [mm]
  round 1.59 hole 1.06: A(5.197,0)
  rect 1.59x1.59 / inner round 1.59 / far side rect 1.59x1.59 hole 1.06: C(-5.197,0)
  silkscreen extent -7.09,-1.18 4.08,1.18, body extent -5.47,-1.35 5.47,1.35, height 2.68

## Part data
C1 C2 C3 C19: library part Cap_0402, "Конденсатор", Manufacturer Part Number=GRM155R71E104KE14D, Temperature=X7R, Tolerance=10%, Voltage=25В, Supplier 1=https://www.chipdip.ru/product/grm155r71e104ke14d-murata
C4 C5: library part Cap_0402, "Конденсатор", Manufacturer Part Number=GRM1535C1H100JDD5D, Temperature=NP0, Tolerance=5%, Voltage="50 В", Supplier 1=https://www.chipdip.ru/product/grm1535c1h100j
C6: library part Cap_0805, "Конденсатор", Manufacturer Part Number=GRM2165C1H472JA01D, Temperature=C0G, Tolerance=5%, Voltage=50В, Supplier 1=https://www.chipdip.ru/product/grm2165c1h472ja01d-kondensator-keramicheskiy-mlcc-murata-8016016109
C7 C8 C9: library part Cap_0603, "Конденсатор", Manufacturer Part Number=GRM188R61E225KA12D, Temperature=X5R, Tolerance=10%, Voltage="25 В", Supplier 1=https://www.chipdip.ru/product/grm188r61e225ka12d-murata
C10 C11 C12 C13 C14 C15 C16 C17 C18: library part Cap_0402, "Конденсатор керамический 25 В, 0.47 мкФ ±10%, X5R, 0402, -55...85 °C", Manufacturer Part Number=GRT155R61E474KE01D, Temperature=X5R, Tolerance=10%, Voltage="25 В", Supplier 1=https://www.chipdip.ru/product/grm21br71e474k
C20 C28: library part JRB2A101M05001000200000B, "100мкФ, 100В, 105°C, 20%, 10x20мм P:5мм, JRB2A101M05001000200000B (К50-35 имп.), Конденсатор электролитический алюминиевый", Temperature=105°C, Tolerance=20%, Voltage=100В, Manufacturer Part Number=JRB2A101M05001000200000B, Supplier 1=https://www.chipdip.ru/product/100mkf-100v-105-c-20-10x20mm-p-5mm-jb-capacitors-9000565887
C21 C29: library part JRB1E102M05001000210000B, "1000мкФ, 25В, 105°C, 20%, 10x21мм P:5мм, JRB1E102M05001000210000B (К50-35 имп.), Конденсатор электролитический алюминиевый", Temperature=105°C, Tolerance=20%, Voltage=25В, Manufacturer Part Number=JRB1E102M05001000210000B, Supplier 1=https://www.chipdip.ru/product/1000mkf-25v-105-c-20-10x21mm-p-5mm-jb-capacitors-9000565924
C22 C23 C24 C25: library part Cap_1206, "Конденсатор", Manufacturer Part Number=GRM31CR61H106KA12L, Temperature=X5R, Tolerance=10%, Voltage="50 В", Supplier 1=https://www.chipdip.ru/product0/9000332404
C26 C27 C33 C35 C38 C39 C41: library part Cap_0603, "Конденсатор", Manufacturer Part Number=GRM188R71H104K, Temperature=X7R, Tolerance=10%, Voltage=50В
  C26 C27: Supplier 1=https://www.chipdip.ru/product/grm188r71h104k
  C33 C35 C38 C39 C41: Supplier 1=https://www.chipdip.ru/product/0.1mkf-x7r-50v-10-0603-grm188r71h104k-kondensator-murata-32715842
C30 C31 C32: library part JRB2D101M05001300250000B, "100мкФ, 200В, 105°C, 20%, 13x25мм P:5мм, JRB2D101M05001300250000B (К50-35 имп.), Конденсатор электролитический алюминиевый", Temperature=105°C, Tolerance=20%, Voltage=200В, Manufacturer Part Number=JRB2D101M05001300250000B, Supplier 1=https://www.chipdip.ru/product/100mkf-200v-105-c-20-13x25mm-p-5mm-jb-capacitors-9000565896
C34 C40: library part Cap_0805, "Конденсатор", Manufacturer Part Number=GRM21BR71E334K, Temperature=X7R, Tolerance=10%, Voltage=25В, Supplier 1=https://www.chipdip.ru/product/0.33mkf-x7r-25v-10-0805-grm21br71e334k-kondensator-murata-263924069
C36 C37 C42 C43: library part JRB2E100M05001000170000B, "10мкФ, 250В, 105°C, 20%, 10x17мм P:5мм, JRB2E100M05001000170000B (К50-35 имп.), Конденсатор электролитический алюминиевый", Temperature=105°C, Tolerance=20%, Voltage=250В, Manufacturer Part Number=JRB2E100M05001000170000B, Supplier 1=https://www.chipdip.ru/product/10mkf-250v-105-c-20-10x17mm-p-5mm-jb-capacitors-9000565843
C44 C45: library part Cap_0603, "Конденсатор", Manufacturer Part Number=GRM188R71C104KA01D, Temperature=X7R, Tolerance=10%, Voltage="16 В", Supplier 1=https://www.chipdip.ru/product/grm188r71c104ka01d
C46: library part Cap_0603, "Конденсатор", Manufacturer Part Number=GRM188R6YA475KE15D, Temperature=X5R, Tolerance=10%, Voltage="35 В", Supplier 1=https://www.chipdip.ru/product0/8021864804
D1: library part MAX3485ESA+, "Single Transmitter/Receiver RS-422/RS-485 8-Pin SOIC N", Manufacturer=Maxim, Supplier Part Number=2518818, Category="RS-232 / RS-422 / RS-485 Interface ICs", ComponentLink1Description=https://datasheet.ciiva.com/14424/max3483-max3491-14424938.pdf?src-supplier=Avnet, ComponentLink1URL=https://datasheet.ciiva.com/14424/max3483-max3491-14424938.pdf?src-supplier=Avnet, ComponentLink2Description=https://datasheet.ciiva.com/1714/max3483-max3491-1714122.pdf?src-supplier=Digikey, ComponentLink2URL=https://datasheet.ciiva.com/1714/max3483-max3491-1714122.pdf?src-supplier=Digikey, Manufacturer Part Number=MAX3485ESA+, Pricing="1=6,17, 10=5,32, 25=4,97, 100=4,61, 300=4,41, 500=4,01, 1000=3,52 (EUR)", RoHS=Yes, Stock=707, Supplier 1=https://www.chipdip.ru/product/max3485eesa-t-maxim
D2: "36-V, 16-bit, I²C output current, voltage and power monitor with alert 16-VQFN -40 to 125", Manufacturer="Texas Instruments", Supplier Part Number=296-36594-1-ND, Category="Amplifiers - Op Amps, Buffer, Instrumentation", ComponentLink1Description=https://datasheet.ciiva.com/15132/getdatasheetpartid-614336-15132773.pdf?src-supplier=Verical, ComponentLink1URL=https://datasheet.ciiva.com/15132/getdatasheetpartid-614336-15132773.pdf?src-supplier=Verical, ComponentLink2Description=https://datasheet.ciiva.com/2965/ina230-2965732.pdf?src-supplier=Avnet, ComponentLink2URL=https://datasheet.ciiva.com/2965/ina230-2965732.pdf?src-supplier=Avnet, ComponentLink3Description=https://datasheet.ciiva.com/29609/ina230-29609254.pdf?src-supplier=Digikey, ComponentLink3URL=https://datasheet.ciiva.com/29609/ina230-29609254.pdf?src-supplier=Digikey, ComponentLink4Description=https://datasheet.ciiva.com/29609/ina230-29609255.pdf?src-supplier=Digikey, ComponentLink4URL=https://datasheet.ciiva.com/29609/ina230-29609255.pdf?src-supplier=Digikey, ComponentLink5Description=https://datasheet.ciiva.com/29609/ina230-29609256.pdf?src-supplier=Digikey, ComponentLink5URL=https://datasheet.ciiva.com/29609/ina230-29609256.pdf?src-supplier=Digikey, Manufacturer Part Number=INA230AIRGTR, Pricing="1=2,83, 10=2,543, 25=2,3988, 100=2,0437, 250=1,919, 500=1,67912, 1000=1,39128 (USD)", RoHS=Yes, Stock=3132, Supplier=Digikey, Supplier 1=https://www.chipdip.ru/product0/8004605923?ysclid=m1f43nxnn781516536
D3 D6: "Драйвер полумостовой", Operating Supply Current="1.6 mA", Operating temperature=-40…125°C, Output Current="120 mA", Output Voltage - Max="20 V", Output Voltage -Min="10 V", Power=625mW, Supplier 1=https://www.chipdip.ru/product/ir2109strpbf-infineon-8012901923, Supply Voltage -Max="20 V", Supply Voltage -Min="10 V"
D4: "Оптоизолятор 2.5кВ двухканальный с транзистором Дарлингтона 8SMD", If - Forward Current="1.6 mA", Maximum Operating Temperature="100 C", Minimum Operating Temperature="-40 C", Output Current="60 mA", Vf - Forward Voltage="1.3 V", Vr - Reverse Voltage="5 V", Supplier 1=https://www.chipdip.ru/product/hcpl2731sd-on-semiconductor-8031911084
D5: "Optocoupler, Transistor Output, 1 Channel, Surface Mount DIP, 4 Pins, 50 mA, 5 kV, 130 %", Case/Package=SMD/SMT, Collector Emitter Breakdown Voltage=70V, Collector Emitter Saturation Voltage=200mV, Current Transfer Ratio=130%, Dark Current=100nA, Forward Current=50mA, Forward Voltage=1.4V, Isolation Voltage=5kV, Manufacturer=onsemi, Manufacturer Lifecycle Status=ACTIVE, Max Junction Temperature (Tj)=125°C, Max Operating Temperature=110°C, Max Power Dissipation=150mW, Min Operating Temperature=-55°C, Power Dissipation=200mW, Reverse Breakdown Voltage=6V, Supplier Part Number=1190577, Category=Optocouplers, China RoHS=Compliant, Collector Emitter Voltage (VCEO)=70V, ComponentLink1Description=https://datasheet.octopart.com:443/FOD817BSD-onsemi-datasheet-180960478.pdf?src-supplier=IHS, ComponentLink1URL=https://datasheet.octopart.com:443/FOD817BSD-onsemi-datasheet-180960478.pdf?src-supplier=IHS, ComponentLink2Description=https://datasheet.octopart.com:443/FOD817BSD-Fairchild-Semiconductor-datasheet-67010145.pdf?src-supplier=IHS, ComponentLink2URL=https://datasheet.octopart.com:443/FOD817BSD-Fairchild-Semiconductor-datasheet-67010145.pdf?src-supplier=IHS, ComponentLink3Description=https://datasheet.octopart.com:443/FOD817BSD-ON-Semiconductor-datasheet-113093828.pdf?src-supplier=JRH+Electronics, ComponentLink3URL=https://datasheet.octopart.com:443/FOD817BSD-ON-Semiconductor-datasheet-113093828.pdf?src-supplier=JRH+Electronics, ComponentLink4Description=https://sigma.octopart.com:443/138799925/technical_drawing/ON-Semiconductor-FOD817BSD.pdf?src-supplier=Upverter, ComponentLink4URL=https://sigma.octopart.com:443/138799925/technical_drawing/ON-Semiconductor-FOD817BSD.pdf?src-supplier=Upverter, ComponentLink5Description=https://datasheet.octopart.com:443/FOD817BSD-ON-Semiconductor-datasheet-11629806.pdf?src-supplier=TME, ComponentLink5URL=https://datasheet.octopart.com:443/FOD817BSD-ON-Semiconductor-datasheet-11629806.pdf?src-supplier=TME, ComponentLink6Description=https://datasheet.octopart.com:443/FOD817BSD-onsemi-datasheet-188912653.pdf?src-supplier=TME, ComponentLink6URL=https://datasheet.octopart.com:443/FOD817BSD-onsemi-datasheet-188912653.pdf?src-supplier=TME, ComponentLink7Description=https://datasheet.octopart.com:443/FOD817BSD-ON-Semiconductor-datasheet-99207756.pdf?src-supplier=Future+Electronics, ComponentLink7URL=https://datasheet.octopart.com:443/FOD817BSD-ON-Semiconductor-datasheet-99207756.pdf?src-supplier=Future+Electronics, ComponentLink8Description=https://datasheet.octopart.com:443/FOD817BSD-Fairchild-Semiconductor-datasheet-8324556.pdf?src-supplier=Future+Electronics, ComponentLink8URL=https://datasheet.octopart.com:443/FOD817BSD-Fairchild-Semiconductor-datasheet-8324556.pdf?src-supplier=Future+Electronics, ComponentLink9Description=https://datasheet.octopart.com:443/FOD817BSD-ON-Semiconductor-datasheet-98551328.pdf?src-supplier=onsemi, ComponentLink9URL=https://datasheet.octopart.com:443/FOD817BSD-ON-Semiconductor-datasheet-98551328.pdf?src-supplier=onsemi, ComponentLink10Description=https://datasheet.octopart.com:443/FOD817BSD-ON-Semiconductor-datasheet-85522120.pdf?src-supplier=onsemi, ComponentLink10URL=https://datasheet.octopart.com:443/FOD817BSD-ON-Semiconductor-datasheet-85522120.pdf?src-supplier=onsemi, ComponentLink11Description=https://datasheet.octopart.com:443/FOD817BSD-ON-Semiconductor-datasheet-86695365.pdf?src-supplier=onsemi, ComponentLink11URL=https://datasheet.octopart.com:443/FOD817BSD-ON-Semiconductor-datasheet-86695365.pdf?src-supplier=onsemi, ComponentLink12Description=https://datasheet.octopart.com:443/FOD817BSD-ON-Semiconductor-datasheet-86689748.pdf?src-supplier=element14+APAC, ComponentLink12URL=https://datasheet.octopart.com:443/FOD817BSD-ON-Semiconductor-datasheet-86689748.pdf?src-supplier=element14+APAC, ComponentLink13Description=https://datasheet.octopart.com:443/FOD817BSD-Fairchild-datasheet-2482.pdf?src-supplier=Mouser, ComponentLink13URL=https://datasheet.octopart.com:443/FOD817BSD-Fairchild-datasheet-2482.pdf?src-supplier=Mouser, ComponentLink14Description=https://datasheet.octopart.com:443/FOD817BSD-Fairchild-Semiconductor-datasheet-49579151.pdf?src-supplier=Newark, ComponentLink14URL=https://datasheet.octopart.com:443/FOD817BSD-Fairchild-Semiconductor-datasheet-49579151.pdf?src-supplier=Newark, ComponentLink15Description=https://datasheet.octopart.com:443/FOD817BSD-ON-Semiconductor-datasheet-91365929.pdf?src-supplier=Newark, ComponentLink15URL=https://datasheet.octopart.com:443/FOD817BSD-ON-Semiconductor-datasheet-91365929.pdf?src-supplier=Newark, ComponentLink16Description=https://datasheet.octopart.com:443/FOD817BSD-onsemi-datasheet-189128609.pdf?src-supplier=Master+Electronics, ComponentLink16URL=https://datasheet.octopart.com:443/FOD817BSD-onsemi-datasheet-189128609.pdf?src-supplier=Master+Electronics, ComponentLink17Description=https://sigma.octopart.com:443/33167772/technical_drawing/Fairchild-Semiconductor-FOD817BSD.pdf?src-supplier=Fairchild+Semiconductor, ComponentLink17URL=https://sigma.octopart.com:443/33167772/technical_drawing/Fairchild-Semiconductor-FOD817BSD.pdf?src-supplier=Fairchild+Semiconductor, ComponentLink18Description=https://sigma.octopart.com:443/17350082/technical_drawing/Fairchild-Semiconductor-FOD817BSD.pdf?src-supplier=Fairchild+Semiconductor, ComponentLink18URL=https://sigma.octopart.com:443/17350082/technical_drawing/Fairchild-Semiconductor-FOD817BSD.pdf?src-supplier=Fairchild+Semiconductor, ComponentLink19Description=https://datasheet.octopart.com:443/FOD817BSD-Fairchild-datasheet-8637997.pdf?src-supplier=Jameco, ComponentLink19URL=https://datasheet.octopart.com:443/FOD817BSD-Fairchild-datasheet-8637997.pdf?src-supplier=Jameco, ComponentLink20Description=https://datasheet.octopart.com:443/FOD817BSD-Fairchild-Semiconductor-datasheet-61452342.pdf?src-supplier=Farnell, ComponentLink20URL=https://datasheet.octopart.com:443/FOD817BSD-Fairchild-Semiconductor-datasheet-61452342.pdf?src-supplier=Farnell, ComponentLink21Description=https://datasheet.octopart.com:443/FOD817BSD-Fairchild-Semiconductor-datasheet-62114928.pdf?src-supplier=Farnell, ComponentLink21URL=https://datasheet.octopart.com:443/FOD817BSD-Fairchild-Semiconductor-datasheet-62114928.pdf?src-supplier=Farnell, ComponentLink22Description=http://sigma.octopart.com:80/150610482/rohs_statement/ON-Semiconductor-FOD817BSD.pdf?src-supplier=Compliance+Statements, ComponentLink22URL=http://sigma.octopart.com:80/150610482/rohs_statement/ON-Semiconductor-FOD817BSD.pdf?src-supplier=Compliance+Statements, ComponentLink23Description=http://sigma.octopart.com:80/17350094/reach_statement/Fairchild-Semiconductor-FOD817BSD.pdf?src-supplier=Compliance+Statements, ComponentLink23URL=http://sigma.octopart.com:80/17350094/reach_statement/Fairchild-Semiconductor-FOD817BSD.pdf?src-supplier=Compliance+Statements, ComponentLink24Description=http://sigma.octopart.com:80/17350098/materials_sheet/Fairchild-Semiconductor-FOD817BSD.pdf?src-supplier=Compliance+Statements, ComponentLink24URL=http://sigma.octopart.com:80/17350098/materials_sheet/Fairchild-Semiconductor-FOD817BSD.pdf?src-supplier=Compliance+Statements, ComponentLink25Description=http://sigma.octopart.com:80/33167956/reach_statement/Fairchild-Semiconductor-FOD817BSD.pdf?src-supplier=Compliance+Statements, ComponentLink25URL=http://sigma.octopart.com:80/33167956/reach_statement/Fairchild-Semiconductor-FOD817BSD.pdf?src-supplier=Compliance+Statements, ComponentLink26Description=http://sigma.octopart.com:80/33167957/materials_sheet/Fairchild-Semiconductor-FOD817BSD.pdf?src-supplier=Compliance+Statements, ComponentLink26URL=http://sigma.octopart.com:80/33167957/materials_sheet/Fairchild-Semiconductor-FOD817BSD.pdf?src-supplier=Compliance+Statements, ComponentLink27Description=http://sigma.octopart.com:80/reach_statement/ON-Semiconductor-company-79.pdf?src-supplier=Compliance+Statements, ComponentLink27URL=http://sigma.octopart.com:80/reach_statement/ON-Semiconductor-company-79.pdf?src-supplier=Compliance+Statements, ComponentLink28Description=http://sigma.octopart.com:80/rohs_statement/Fairchild-Semiconductor-company-11.pdf?src-supplier=Compliance+Statements, ComponentLink28URL=http://sigma.octopart.com:80/rohs_statement/Fairchild-Semiconductor-company-11.pdf?src-supplier=Compliance+Statements, ComponentLink29Description=http://sigma.octopart.com:80/rohs_statement/Fairchild-Semiconductor-company-10.pdf?src-supplier=Compliance+Statements, ComponentLink29URL=http://sigma.octopart.com:80/rohs_statement/Fairchild-Semiconductor-company-10.pdf?src-supplier=Compliance+Statements, ComponentLink30Description=http://sigma.octopart.com:80/reach_statement/Fairchild-Semiconductor-company-9.pdf?src-supplier=Compliance+Statements, ComponentLink30URL=http://sigma.octopart.com:80/reach_statement/Fairchild-Semiconductor-company-9.pdf?src-supplier=Compliance+Statements, ComponentLink31Description=https://octopart.com:443/opatz8j6/c1?t=2OuS15dud8hiB_awp-DQ-07s1LQDF22Cr1fwQKtyVtUYb04vdBjUyNDKKuvr4wkdRxLtERHgqViJqWkTeNBKTdnTkVY2D1nDxfbO5h2fF1LfkcGDWl4D222U1D-tBlXhHTxouI2AVsrzVRemG0SS3H6sW1MSOkrKkFJ4G0RoiKxMnzMg8mILW7BVIW19nuoux7fwrO0RunnQ-qEWRZB9nm4RjI5EnRBraXhhg_8Jbf0Z5zDmWE4pmUtAopGBxl1lqpyawLRVoWByB2PNMH9fKF0UjTc-KtwwjIOepqcHmBTwo6_YdKVeaWahmHfZtg9hUP14M4pE3RtfggEzRX9LWEFlvFULr5TZ0fLS&src-supplier=Compliance+Statements, ComponentLink31URL=https://octopart.com:443/opatz8j6/c1?t=2OuS15dud8hiB_awp-DQ-07s1LQDF22Cr1fwQKtyVtUYb04vdBjUyNDKKuvr4wkdRxLtERHgqViJqWkTeNBKTdnTkVY2D1nDxfbO5h2fF1LfkcGDWl4D222U1D-tBlXhHTxouI2AVsrzVRemG0SS3H6sW1MSOkrKkFJ4G0RoiKxMnzMg8mILW7BVIW19nuoux7fwrO0RunnQ-qEWRZB9nm4RjI5EnRBraXhhg_8Jbf0Z5zDmWE4pmUtAopGBxl1lqpyawLRVoWByB2PNMH9fKF0UjTc-KtwwjIOepqcHmBTwo6_YdKVeaWahmHfZtg9hUP14M4pE3RtfggEzRX9LWEFlvFULr5TZ0fLS&src-supplier=Compliance+Statements, ComponentLink32Description=https://octopart.com:443/opatz8j6/c1?t=FFG_DC80JtruglX_HDP91gzsMwR13fxxkH_F3qcsgv835Sckaqh0XoMMkjr9Xm6n53vUMcFhZdRxZUaOiXKEpziVr_MHF241f_irKM6sV7CDFCSg9OIr6yiMkTD2zr6wiIa6WV_NkigJy29Fhwmg1m-UuSG1FnEbeldEUFG0L2j6ZHDzDhgkJHKMYl647Yu2VnJhiyvnXuXJW9BQy0wQcz7wOqUYovLIYLqOxKZMCY31ibnz1zvaL2IfdgsKEKbqjrdm2M9R683KWiwGreD87g6pEsuBtui6WuaAQ53GxNzJ4q_5BlDemMzchI0axU44Y1EiajOyTCBavRYBXk7g4Zi4MYonob1uQF220w&src-supplier=Compliance+Statements, ComponentLink32URL=https://octopart.com:443/opatz8j6/c1?t=FFG_DC80JtruglX_HDP91gzsMwR13fxxkH_F3qcsgv835Sckaqh0XoMMkjr9Xm6n53vUMcFhZdRxZUaOiXKEpziVr_MHF241f_irKM6sV7CDFCSg9OIr6yiMkTD2zr6wiIa6WV_NkigJy29Fhwmg1m-UuSG1FnEbeldEUFG0L2j6ZHDzDhgkJHKMYl647Yu2VnJhiyvnXuXJW9BQy0wQcz7wOqUYovLIYLqOxKZMCY31ibnz1zvaL2IfdgsKEKbqjrdm2M9R683KWiwGreD87g6pEsuBtui6WuaAQ53GxNzJ4q_5BlDemMzchI0axU44Y1EiajOyTCBavRYBXk7g4Zi4MYonob1uQF220w&src-supplier=Compliance+Statements, Contact Plating=Tin, Country of Origin=Thailand, Export Control Classification Number (ECCN) Code=EAR99, Fall Time=18µs, Harmonized Tariff Schedule (HTS) Code=8541.40.80.00, Height=4.35mm, Input Current=50mA, Introduction Date=2004-04-28, Lead Free="Lead Free", Length=5.1mm, Lifecycle Status=Production, Manufacturer Part Number=FOD817BSD, Max Collector Current=50mA, Max Input Current=50mA, Max Output Voltage=70V, Mounting Technology="Surface Mount", Number of Channels=1, Number of Circuits=1, Number of Elements=1, Output Current per Channel=50mA, Output Voltage=70V, Pins=4, Pricing="1000=0,0878, 3000=0,0853, 4000=0,0847, 10000=0,0827, 15000=0,0807 (USD)", Radiation Hardening=No, REACH SVHC=Yes, Reverse Voltage=6V, Reverse Voltage (DC)=6V, Rise Time=18µs, RoHS=Compliant, Schedule B="8541408000, 8541408000|8541408000, 8541408000|8541408000|8541408000, 8541408000|8541408000|8541408000|8541408000", Stock=578000, Supplier="Future Electronics", Supplier 1=https://www.chipdip.ru/product/fod817bsd-optoizolyator-5kv-optopara-on-semiconductor-9000101821, Weight=0g, Width=7mm
D7: library part CP2104-F03-GMR, "Interface IC full speed basic USB type-C controller USB 2.0 3.3V, CP2104-F03-GMR, WFQFN-24", Manufacturer="Silicon Labs", Supplier Part Number=634-CP2104-F03-GMR, Category="Interface ICs", ComponentLink1Description=https://datasheet.ciiva.com/14939/cp2104-14939979.pdf?src-supplier=Digikey, ComponentLink1URL=https://datasheet.ciiva.com/14939/cp2104-14939979.pdf?src-supplier=Digikey, ComponentLink2Description=https://datasheet.ciiva.com/15150/getdatasheetpartid-711722-15150533.pdf?src-supplier=Verical, ComponentLink2URL=https://datasheet.ciiva.com/15150/getdatasheetpartid-711722-15150533.pdf?src-supplier=Verical, Height=800um, Manufacturer Part Number=CP2104-F03-GMR, Pricing="1=5,43, 10=4,87, 50=4,87, 100=3,99, 1000=2,87, 10000=2,62 (USD)", RoHS=Yes, Stock=2589, Supplier=Mouser, Supplier 1=https://www.chipdip.ru/product0/8023203867